# Altium PCB Power_meter.PCBDOC (part 2 of 2)
Units mm, origin at the board's own origin, x right, y up, seen from the top; angles counter-clockwise.
Board outline 21.4 x 72.8 mm, 2 copper layers (Top, Bot), stack 1.621 mm thick; 101 components, 79 nets, 320 pads, 151 vias.
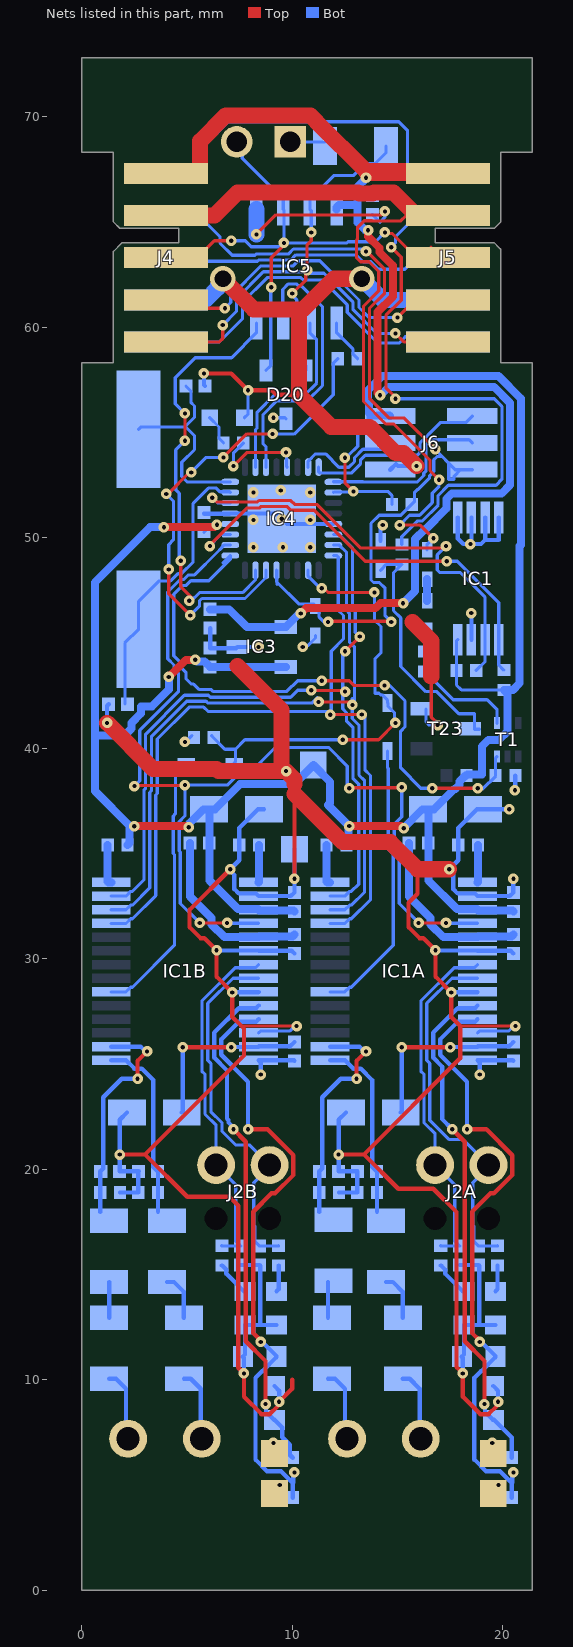
[diagram p2: the nets of this part, all layers, seen from the top]

## Via types
v1: diameter 0.5, hole 0.2, Top to Bot, tented both sides, 149 vias
v2: diameter 1.2, hole 0.8, Top to Bot, tented both sides, 2 vias

## Nets (pads, with @x,y where several pads share a name; then routed paths per layer and width w, separated by ;. In a path a pad name is that pad's centre, name@x,y a point inside that pad or via, vN(x,y) a via of type N, cw(c..) or ccw(c..) an arc to the next point about the centre after c; other vN are vias at no path point) (continued)
GND: C1A.1 C1B.1 C2A.2 C2B.2 C3.2 C3A.1 C3B.1 C4A.1 C4B.1 C5A.1 C5B.1 C6A.2 C6B.2 C7A.1 C7B.1 C8A.2 C8B.2 C9A.1 C9B.1 C10A.2 C10B.2 C11A.2 C11B.2 C12.1 C13.1 C14.1 C15.1 C16.1 D20.3 D21.2 D38.2 IC1.1 IC1.2 IC1.3 IC1.4 IC1.7 IC1A.2 IC1A.6 IC1A.9 IC1A.12 IC1A.14 IC1B.2 IC1B.6 IC1B.9 IC1B.12 IC1B.14 IC3.3 IC4.5 IC4.21 IC4.33 IC5.5 J4.9 J5.9 J6.6 LD1.1 R6A.1 R6B.1 R7A.1 R7B.1 R9A.1 R9B.1 R11A.2 R11B.2 R14A.2 R14B.2 R22.2 R146.1 T23.2 TP4.1 | length 243.1
  Top w0.152: 7.579,26.8 v1(10.2,26.8) ; v1(8.295,64.405) 9.222,65.332 14.233,65.332 v1(14.4,65.5) ; 16.6,43.4 16.6,41.477 16.9,41.177 v1(16.9,41.1) ; 17.979,26.8 v1(20.6,26.8)
  Top w0.203: v1(1.8,20.7) 3,20.7 ; v1(5.8,57.8) 7.1,57.8 v1(7.9,57) 9.04,57 9.254,56.786 10.314,56.786 ; v1(7.05,34.25) 5.121,32.321 5.121,31.502 5.644,30.979 5.821,30.979 v1(6.4,30.4) 6.4,29.15 v1(7.15,28.4) 7.15,27.229 7.579,26.8 7.7,26.679 7.7,25.4 3,20.7 ; 10,10 10,9.579 v1(9.373,8.952) 9.316,8.895 9.316,8.76 8.925,8.369 8.529,8.369 7.7,9.198 v1(7.7,10.3) 7.429,10.571 7.429,18.271 7.01,18.69 5.01,18.69 3,20.7 ; v1(10.1,33.8) 10.1,37.828 10.1,38.3 ; v1(12.2,20.7) 13.4,20.7 ; 15.95,34.25 15.95,33.09 15.521,32.662 15.521,31.502 16.044,30.979 16.221,30.979 v1(16.8,30.4) 16.8,29.15 v1(17.55,28.4) 17.55,27.229 17.979,26.8 17.979,25.279 13.4,20.7 ; v1(19.773,8.952) 19.716,8.895 19.716,8.76 19.325,8.369 18.929,8.369 18.1,9.198 v1(18.1,10.3) 17.8,10.6 17.8,17.968 16.697,19.071 15.029,19.071 13.4,20.7
  Top w0.762: v1(1.2,41.2) 3.392,39.008 6.392,39.008 6.487,38.913 9.487,38.913 9.487,41.813 7.4,43.9 ; v2(6.7,62.3) 8.158,60.842 10.314,60.842 ; v1(9.703,38.913) 10.1,38.516 10.1,38.3 ; 10.1,37.828 12.386,35.542 14.658,35.542 15.95,34.25 v1(17.45,34.25) ; v2(13.3,62.3) 11.972,62.3 10.514,60.842 10.314,60.842 ; 15.7,46 16.6,45.1 16.6,43.4 ; v1(15.9,53.4) 15.284,54.016 14.913,54.016 13.671,55.258 11.842,55.258 10.314,56.786 10.314,60.842
  Bot w0.152: v1(4.9,40.3) 4.93,40.3 R22.2@5.23,40.6 ; LD1.1@7.725,55.7 7.9,55.875 v1(7.9,57) ; IC1B.12@8.4,26.475 8.488,26.563 9.869,26.563 10.106,26.8 v1(10.2,26.8) ; v1(9.1,55.7) 9.65,55.7 D20.3@9.7,55.65 ; v1(10.5,44.809) 10.567,44.875 10.742,44.875 11.1,45.234 D21.2@11.1,45.359 ; C3.2@13.8,65.35 14.164,64.986 14.4,65.222 v1(14.4,65.5) ; T23.2@16.35,41.85 16.35,41.25 16.5,41.1 v1(16.9,41.1) ; IC1A.12@18.8,26.475 18.888,26.563 20.269,26.563 20.506,26.8 v1(20.6,26.8)
  Bot w0.203: v1(1.2,41.2) 1.2,42.011 C16.1@1.277,42.088 ; R6B.1@1.82,18.9 R7B.1@2.68,18.9 2.68,19.88 C5B.1@2.7,19.9 C4B.1@1.8,19.9 v1(1.8,20.7) 1.8,22.35 C2B.2@2.15,22.7 ; C14.1@5.8,51.15 5.819,51.131 7.031,51.131 IC4.5@7.05,51.15 9.25,51.15 v1(9.5,50.9) 9.75,50.65 IC4.21@11.95,50.65 ; v1(5.8,57.8) 5.8,57.25 C15.1@5.85,57.2 ; C13.1@6.1,44.75 C12.1@6.1,45.7 ; C13.1@6.1,44.75 7.33,44.75 IC3.3@7.389,44.809 v1(8.4,44.809) ; v1(6.4,30.4) 6.413,30.388 8.388,30.388 IC1B.6@8.4,30.375 9.975,30.375 C9B.1@10.1,30.25 ; v1(7.15,28.4) 7.163,28.413 8.388,28.413 IC1B.9@8.4,28.425 ; C7B.1@7.55,15.45 C8B.2@8.45,15.45 8.479,15.421 8.479,12.6 ; v1(7.7,10.3) 7.7,11.05 C6B.2@7.65,11.1 7.75,11.2 R9B.1@7.75,12.6 8.479,12.6 ; v1(8.5,24.5) 8.5,25.075 IC1B.14@8.4,25.175 10.075,25.175 C3B.1@10.1,25.15 ; C11B.2@8.65,37.1 8.375,37.1 7.48,36.205 R14B.2@7.48,35.4 7.48,34.68 v1(7.05,34.25) 7.05,34.17 7.246,33.973 7.246,33.305 7.453,33.098 8.277,33.098 IC1B.2@8.4,32.975 9.925,32.975 C10B.2@10.1,33.15 v1(10.1,33.8) TP4.1@10.1,35.2 ; C1B.1@9.15,9.7 9.373,9.477 v1(9.373,8.952) ; R11B.2@9.25,12.6 8.479,12.6 ; R6A.1@12.22,18.9 R7A.1@13.08,18.9 13.08,19.88 C5A.1@13.1,19.9 C4A.1@12.2,19.9 v1(12.2,20.7) 12.2,22.35 C2A.2@12.55,22.7 ; D38.2@14.192,49.85 14.192,50.539 14.253,50.6 v1(14.3,50.6) ; J6.6@14.65,53.23 14.92,53.5 15.02,53.4 v1(15.9,53.4) ; v1(16.8,30.4) 16.812,30.388 18.787,30.388 IC1A.6@18.8,30.375 20.375,30.375 C9A.1@20.5,30.25 ; v1(17.55,28.4) 17.562,28.413 18.787,28.413 IC1A.9@18.8,28.425 ; IC1.1@17.858,50.958 17.858,49.958 18.119,49.698 v1(18.459,49.698) ; C7A.1@17.95,15.45 C8A.2@18.85,15.45 18.879,15.421 18.879,12.6 ; v1(18.1,10.3) 18.1,11.05 C6A.2@18.05,11.1 18.15,11.2 R9A.1@18.15,12.6 18.879,12.6 ; v1(18.5,46.419) 18.508,46.411 IC1.7@18.508,45.158 ; IC1.2@18.508,50.958 18.508,49.747 v1(18.459,49.698) ; v1(18.9,24.5) 18.9,25.075 IC1A.14@18.8,25.175 20.475,25.175 C3A.1@20.5,25.15 ; IC1.3@19.158,50.958 19.158,49.889 ; C1A.1@19.55,9.7 19.773,9.477 v1(19.773,8.952) ; R11A.2@19.65,12.6 18.879,12.6 ; IC1.4@19.808,50.958 19.808,49.895 19.803,49.889 19.158,49.889 ; v1(20.3,37.1) C11A.2@19.05,37.1 18.775,37.1 17.88,36.205 R14A.2@17.88,35.4 17.88,34.68 v1(17.45,34.25) 17.45,34.17 17.646,33.973 17.646,33.305 17.853,33.098 18.677,33.098 IC1A.2@18.8,32.975 20.325,32.975 C10A.2@20.5,33.15 v1(20.5,33.8) ; v1(20.575,38) 20.595,38.02 R146.1@20.595,38.694 ; v1(18.459,49.698) 18.967,49.698 19.158,49.889
  Bot w0.762: J4.9@5.9,61.311 6.458,61.869 6.458,61.939 6.7,62.181 v2(6.7,62.3) ; v1(8.295,64.405) IC5.5@8.295,65.6 ; v2(13.3,62.3) 14.3,61.3 17.3,61.3 J5.9@17.4,61.4
  other v1: 8.153,49.547 9.553,49.547 10.853,49.547 8.153,50.847 10.853,50.847 8.153,52.147 10.853,52.147 9.453,52.247
I1N_INA: R3A.1 TP1A.1 | length 0.7
  Bot w0.203: R3A.1@19.48,6.3 19.49,6.31 19.49,6.99 v1(19.5,7)
I1N_INB: R3B.1 TP1B.1 | length 0.7
  Bot w0.203: R3B.1@9.08,6.3 9.09,6.31 9.09,6.99 v1(9.1,7)
I1NA: C1A.2 IC1A.10 R3A.2 | length 24.4
  Top w0.203: v1(17.6,21.9) 18.191,21.309 18.191,11.832 19.127,10.896 v1(19.127,8.848)
  Bot w0.203: v1(17.6,21.9) 17.117,22.383 17.117,24.875 16.691,25.301 16.691,26.49 17.853,27.652 18.677,27.652 IC1A.10@18.8,27.775 ; v1(19.127,8.848) 19.152,8.823 19.152,8.473 19.525,8.1 C1A.2@19.55,8.1 19.575,8.1 20.42,7.255 R3A.2@20.42,6.3
I1NB: C1B.2 IC1B.10 R3B.2 | length 24.4
  Top w0.203: v1(7.2,21.9) 7.791,21.309 7.791,11.832 8.727,10.896 v1(8.727,8.848)
  Bot w0.203: v1(7.2,21.9) 7.2,21.98 6.964,22.216 6.964,22.336 6.902,22.398 6.902,24.69 6.291,25.301 6.291,26.49 7.453,27.652 8.277,27.652 IC1B.10@8.4,27.775 ; v1(8.727,8.848) 8.752,8.823 8.752,8.473 9.125,8.1 C1B.2@9.15,8.1 9.521,7.729 9.521,7.273 9.879,6.915 9.879,6.441 R3B.2@10.02,6.3
I1P_INA: R10A.1 TP2A.1 | length 1.1
  Top w0.203: TP2A.1@19.55,4.835 19.757,5.043 v1(19.8,5)
  Bot w0.203: R10A.1@19.48,4.4 19.668,4.588 19.668,4.788 19.8,4.92 v1(19.8,5)
I1P_INB: R10B.1 TP2B.1 | length 1.1
  Top w0.203: TP2B.1@9.15,4.835 9.357,5.043 v1(9.4,5)
  Bot w0.203: R10B.1@9.08,4.4 9.268,4.588 9.268,4.788 9.4,4.92 v1(9.4,5)
I1PA: C6A.1 IC1A.11 R10A.2 | length 29.4
  Top w0.203: v1(18.3,21.9) 19.216,21.9 20.449,20.667 20.449,19.733 19.574,18.858 19.416,18.858 18.541,17.983 18.541,12.226 18.9,11.867 v1(18.9,11.8)
  Bot w0.203: v1(18.3,21.9) 18.3,24.159 17.021,25.438 17.021,26.17 17.853,27.002 18.677,27.002 IC1A.11@18.8,27.125 ; v1(18.9,11.8) 18.975,11.8 19.65,11.125 C6A.1@19.65,11.1 19.65,11.075 18.979,10.404 18.955,10.404 18.648,10.097 18.648,6.208 19.203,5.654 19.866,5.654 20.42,5.1 ; R10A.2@20.42,4.4 20.42,5.1 ; v1(20.5,5.6) 20.443,5.543 20.443,5.123 20.42,5.1
I1PB: C6B.1 IC1B.11 R10B.2 | length 29.4
  Top w0.203: v1(7.9,21.9) 8.816,21.9 10.049,20.667 10.049,19.733 9.174,18.858 9.016,18.858 8.141,17.983 8.141,12.226 8.5,11.867 v1(8.5,11.8)
  Bot w0.203: v1(7.9,21.9) 7.9,24.159 6.621,25.438 6.621,26.17 7.453,27.002 8.277,27.002 IC1B.11@8.4,27.125 ; v1(8.5,11.8) 8.575,11.8 9.25,11.125 C6B.1@9.25,11.1 9.25,11.075 8.579,10.404 8.555,10.404 8.248,10.097 8.248,6.208 8.803,5.654 9.466,5.654 10.02,5.1 ; R10B.2@10.02,4.4 10.02,5.1 ; v1(10.1,5.6) 10.043,5.543 10.043,5.123 10.02,5.1
I2N_INA: R11A.1 R12A.2 | length 1.3
  Bot w0.203: R11A.1@19.65,14.2 19.75,14.3 R12A.2@19.75,15.43
I2N_INB: R11B.1 R12B.2 | length 1.3
  Bot w0.203: R11B.1@9.25,14.2 9.35,14.3 R12B.2@9.35,15.43
I2NA: C8A.1 IC1A.8 J2A.2 R12A.1 | length 17.4
  Bot w0.152: IC1A.8@18.8,29.075 17.584,29.075 16.386,27.877 16.386,25.175 16.533,25.029 16.533,22.326 17.439,21.42 18.1,21.42 J2A.2@19.32,20.2 19.32,20.11 18.567,19.357 18.567,17.348 18.616,17.299 18.616,16.584 C8A.1@18.85,16.35 19.73,16.35 R12A.1@19.75,16.37
I2NB: C8B.1 IC1B.8 J2B.2 R12B.1 | length 17.4
  Bot w0.152: IC1B.8@8.4,29.075 7.184,29.075 5.986,27.877 5.986,25.175 6.133,25.029 6.133,22.736 6.659,22.21 6.659,21.8 7.302,21.157 7.963,21.157 J2B.2@8.92,20.2 8.92,20.11 8.167,19.357 8.167,17.348 8.216,17.299 8.216,16.584 C8B.1@8.45,16.35 9.33,16.35 R12B.1@9.35,16.37
I2P_INA: R8A.2 R9A.2 | length 1.7
  Bot w0.203: R8A.2@17.05,15.43 17.07,15.43 17.258,15.242 17.258,15.042 18.1,14.2 R9A.2@18.15,14.2
I2P_INB: R8B.2 R9B.2 | length 1.7
  Bot w0.203: R8B.2@6.65,15.43 6.67,15.43 6.858,15.242 6.858,15.042 7.7,14.2 R9B.2@7.75,14.2
I2PA: C7A.2 IC1A.7 J2A.1 R8A.1 | length 16.7
  Bot w0.152: R8A.1@17.05,16.37 17.07,16.35 C7A.2@17.95,16.35 17.716,16.584 17.716,19.264 J2A.1@16.78,20.2 16.78,21.684 16.253,22.211 16.253,24.51 16.107,24.656 16.107,27.993 17.69,29.576 18.651,29.576 IC1A.7@18.8,29.725
I2PB: C7B.2 IC1B.7 J2B.1 R8B.1 | length 16.7
  Bot w0.152: R8B.1@6.65,16.37 6.67,16.35 C7B.2@7.55,16.35 7.316,16.584 7.316,19.264 J2B.1@6.38,20.2 6.38,22.094 5.853,22.621 5.853,24.51 5.707,24.656 5.707,27.993 7.29,29.576 8.251,29.576 IC1B.7@8.4,29.725
IRQ: D8.1 D9.1 IC4.26 R22.1 | length 20.9
  Top w0.152: v1(11.4,47.6) 11.494,47.6 11.694,47.4 v1(13.9,47.4) ; v1(12.4,40.4) 14.1,40.4 v1(14.9,41.2)
  Bot w0.152: R22.1@6.17,40.6 6.17,40.58 6.8,39.95 7.3,39.95 ; D8.1@7.24,39.3 7.3,39.36 7.3,39.95 ; IC4.26@10.75,48.45 10.75,48.176 11.326,47.6 v1(11.4,47.6) ; v1(12.4,40.4) 7.75,40.4 7.3,39.95 ; v1(13.9,47.4) 13.9,46.095 14.212,45.783 14.212,44.528 13.929,44.245 13.929,42.611 14.115,42.611 14.195,42.53 14.282,42.53 14.518,42.294 D9.1@14.518,42.145 ; D9.1@14.546,42.145 14.546,41.994 14.854,41.686 14.854,41.246 v1(14.9,41.2)
LED: IC4.13 R23.1 | length 4.8
  Top w0.152: v1(7.2,53.4) 7.85,54.05 v1(9.7,54.05)
  Bot w0.152: v1(7.2,53.4) 7.2,54.01 7.67,54.48 R23.1@7.67,54.5 ; v1(9.7,54.05) 9.725,54.025 9.725,53.375 IC4.13@9.75,53.35
MODBUS_A: D20.1 IC5.6 J4.3 J5.3 JP1.2 | length 27.5
  Top w0.152: J4.3@4,63.3 5.5,63.3 6.3,64.1 v1(7.1,64.1) ; v1(9,61.9) 9,63.3 9.6,63.9 v1(9.6,64) ; v1(14.4,64.5) 14.45,64.45 14.75,64.45 15.9,63.3 J5.3@17.016,63.3 ; J5.3@16.592,63.794 16.592,63.724 J5.3@17.016,63.3 ; J5.3@17.4,63.3 J5.3@17.016,63.3
  Bot w0.152: v1(7.1,64.1) 7.774,64.1 8.053,63.821 9.521,63.821 9.6,63.9 v1(9.6,64) ; JP1.2@7.36,68.8 7.618,68.542 7.618,68.022 9.565,66.075 IC5.6@9.565,65.6 9.6,65.565 v1(9.6,64) ; D20.1@8.75,57.95 8.974,58.174 8.974,61.874 v1(9,61.9) ; v1(14.4,64.5) 13.953,64.053 12.643,64.053 12.59,64 v1(9.6,64)
MODBUS_B: D20.2 IC5.7 J4.5 J5.5 R6.1 | length 30.8
  Top w0.152: J4.5@4,59.3 6.541,59.3 6.7,59.459 v1(6.7,60.1) ; v1(10,61.6) 10.633,62.233 10.633,62.633 v1(10.7,62.7) 10.7,63.906 10.9,64.106 v1(10.9,64.5) ; v1(14.9,59.7) 15.3,59.3 J5.5@17.4,59.3
  Bot w0.152: v1(6.7,60.1) 7.35,60.75 7.35,61.355 8.628,62.632 10.633,62.632 v1(10.7,62.7) 10.843,62.557 11.505,62.557 12.888,61.175 12.888,60.817 14.005,59.7 v1(14.9,59.7) ; v1(10,61.6) 10,61.506 10.211,61.295 10.211,58.614 10.65,58.175 D20.2@10.65,57.95 ; v1(10.9,64.5) 10.9,65.535 IC5.7@10.835,65.6 10.835,66.075 11.96,67.2 12.9,67.2 13.476,67.776 13.951,67.776 14.45,68.275 R6.1@14.45,68.6
MODBUS_DE: IC4.11 IC5.3 | length 12.9
  Bot w0.152: IC4.11@8.75,53.35 8.75,54.321 8.608,54.463 8.608,55.849 9.259,56.5 10.707,56.5 11.433,57.225 11.433,60.965 10.43,61.967 10.274,61.967 10.188,62.053 9.812,62.053 9.547,61.788 9.547,61.018 9.565,61
MODBUS_DI: IC4.31 IC5.4 | length 20.6
  Top w0.152: v1(4.7,48.9) 4.7,47.677 5.203,47.174 5.1,47.07 v1(5.1,47) ; v1(4.9,54.6) v1(4.9,55.9)
  Bot w0.152: v1(4.7,48.9) 4.633,48.967 4.633,52.104 4.467,52.269 4.467,54.167 v1(4.9,54.6) ; v1(4.9,55.9) 4.437,56.363 4.437,57.594 5.39,58.548 7.118,58.548 8.295,59.725 IC5.4@8.295,60.2 ; v1(5.1,47) 5.197,47 5.203,46.994 5.203,47.006 5.59,47.393 7.638,47.393 8.25,48.005 IC4.31@8.25,48.45
MODBUS_R_En: IC4.10 IC5.2 | length 9
  Bot w0.152: IC4.10@8.25,53.35 8.25,55.138 8.328,55.216 8.328,55.964 9.143,56.779 10.592,56.779 11.153,57.341 11.153,59.407 10.835,59.725 IC5.2@10.835,60.2
MODBUS_RO: IC4.30 R7.1 | length 23
  Top w0.152: v1(4.014,52.081) 4.098,52.081 5.117,53.1 v1(5.2,53.1) ; v1(4.127,48.494) 4.127,47.332 v1(5.15,46.309) ; v1(6.726,53.813) 7.844,54.931 v1(9.061,54.931)
  Bot w0.152: v1(4.014,52.081) 4.353,51.742 4.353,49.898 4.127,49.671 v1(4.127,48.494) ; v1(5.15,46.309) 5.587,46.746 5.587,46.994 5.706,47.113 7.753,47.113 8.75,48.11 IC4.30@8.75,48.45 ; v1(5.2,53.1) 5.913,53.813 v1(6.726,53.813) ; v1(9.061,54.931) 9.07,54.922 10.084,54.922 11.949,56.786 11.949,58.286 R7.1@12.162,58.5
NetC9A_2: C9A.2 IC1A.5 L1A.2 | length 8.5
  Bot w0.381: L1A.2@15.54,35.5 15.54,32.963 16.567,31.935 16.567,31.63 17.172,31.025 IC1A.5@18.8,31.025 18.834,31.06 20.409,31.06 C9A.2@20.5,31.15
NetC9B_2: C9B.2 IC1B.5 L1B.2 | length 8.5
  Bot w0.381: L1B.2@5.14,35.5 5.14,32.963 6.168,31.935 6.168,31.63 6.772,31.025 IC1B.5@8.4,31.025 8.435,31.06 10.01,31.06 C9B.2@10.1,31.15
NetC15_2: C15.2 IC4.8 Q1.1 | length 9.7
  Bot w0.152: Q1.1@2.7,55.15 2.805,55.255 4.95,55.255 ; C15.2@4.95,57.2 5.184,56.966 5.184,56.424 5.353,56.255 5.353,55.712 4.95,55.309 4.95,55.255 ; IC4.8@7.05,52.65 7.047,52.647 5.012,52.647 4.747,52.912 4.747,53.579 5.353,54.185 5.353,54.851 4.95,55.255
NetC16_2: C16.2 IC4.7 Q1.2 | length 13.4
  Bot w0.152: C16.2@2.05,42.1 2.05,45 Q1.2@2.7,45.65 2.7,46.973 3.674,47.947 4.22,47.947 4.565,48.291 4.732,48.291 5.287,48.846 5.287,51.628 6.012,52.353 6.388,52.353 6.561,52.18 7.02,52.18 IC4.7@7.05,52.15
NetD8_2: D8.2 IC1B.20 | length 13
  Bot w0.152: IC1B.20@1.4,28.425 2.1,28.425 2.322,28.647 2.409,28.647 4.397,30.635 4.397,34.951 4.347,35 4.347,36.778 4.447,36.877 4.447,38.977 4.77,39.3 D8.2@4.96,39.3
NetD9_2: D9.2 IC1A.20 | length 13.3
  Bot w0.152: IC1A.20@11.8,28.425 12.5,28.425 12.722,28.647 12.809,28.647 14.797,30.635 14.797,34.951 14.558,35.189 14.558,39.041 14.518,39.082 D9.2@14.518,39.865
NetD38_1: D38.1 R9.2 T23.3 | length 11.7
  Bot w0.152: D38.1@14.192,48.45 14.472,48.73 R9.2@15.2,48.73 14.805,48.335 14.805,46.535 15.153,46.188 15.153,43.883 16.347,42.689 16.858,42.689 17.912,41.635 18.65,41.635 18.65,40.9 T23.3@18.883,40.9
NetD107_2: D107.2 D108.1 | length 1
  Bot w0.381: D108.1@16.4,47 D107.2@16.4,48.03
NetD108_2: D108.2 R145.2 | length 1.1
  Bot w0.152: R145.2@16.275,44.588 16.275,45.475 D108.2@16.4,45.6
NetIC1A_1: IC1A.1 R14A.1 | length 1.8
  Bot w0.381: IC1A.1@18.8,33.625 18.82,33.645 R14A.1@18.82,35.4
NetIC1A_28: IC1A.28 R13A.1 | length 1.9
  Bot w0.381: R13A.1@11.63,35.4 11.63,33.66 11.664,33.625 IC1A.28@11.8,33.625
NetIC1B_1: IC1B.1 R14B.1 | length 1.8
  Bot w0.381: IC1B.1@8.4,33.625 8.42,33.645 R14B.1@8.42,35.4
NetIC1B_28: IC1B.28 R13B.1 | length 1.9
  Bot w0.381: R13B.1@1.23,35.4 1.23,33.66 1.265,33.625 IC1B.28@1.4,33.625
NetIC5_1: IC5.1 R7.2 | length 2.1
  Bot w0.152: IC5.1@12.105,60.2 12.105,59.725 12.889,58.941 12.889,58.714 R7.2@13.102,58.5
NetJ1A_1: J1A.1 R2A.2 | length 3.4
  Bot w0.203: R2A.2@11.7,10.05 12.025,10.05 12.498,9.577 12.498,7.302 J1A.1@12.6,7.2
NetJ1A_2: J1A.2 R5A.2 | length 3.4
  Bot w0.203: R5A.2@15.25,10.05 15.575,10.05 16.048,9.577 16.048,7.252 J1A.2@16.1,7.2
NetJ1B_1: J1B.1 R2B.2 | length 3.4
  Bot w0.203: R2B.2@1.3,10.05 1.625,10.05 2.098,9.577 2.098,7.302 J1B.1@2.2,7.2
NetJ1B_2: J1B.2 R5B.2 | length 3.4
  Bot w0.203: R5B.2@4.85,10.05 5.175,10.05 5.648,9.577 5.648,7.252 J1B.2@5.7,7.2
NetJ5_7: J5.7 R9.1 | length 26.6
  Top w0.152: v1(14.7,63.8) 15.17,63.33 15.17,61.282 14.447,60.559 14.447,57.127 14.9,56.673 v1(14.9,56.6)
  Bot w0.152: v1(14.7,63.8) 14.903,64.003 14.903,64.303 15.9,65.3 J5.7@17.4,65.3 ; v1(14.9,56.6) 19.588,56.6 19.953,56.234 19.953,52.766 19.681,52.494 17.413,52.494 16.922,52.003 16.922,51.549 16.16,50.787 15.935,50.787 15.2,50.052 R9.1@15.2,49.67
NetJP1_1: JP1.1 R6.2 | length 1.8
  Bot w0.152: JP1.1@9.9,68.8 11.55,68.8 R6.2@11.65,68.9
NetLD1_2: LD1.2 R23.2 | length 1.5
  Bot w0.152: LD1.2@6.075,55.7 6.516,55.259 6.516,54.714 R23.2@6.73,54.5
NetR1A_2: R1A.2 R2A.1 | length 1.7
  Bot w0.203: R2A.1@11.7,12.95 R1A.2@11.7,14.65
NetR1B_2: R1B.2 R2B.1 | length 1.7
  Bot w0.203: R2B.1@1.3,12.95 R1B.2@1.3,14.65
NetR4A_2: R4A.2 R5A.1 | length 2.2
  Bot w0.203: R4A.2@14.45,14.65 14.775,14.65 15.248,14.177 15.248,12.952 R5A.1@15.25,12.95
NetR4B_2: R4B.2 R5B.1 | length 2.2
  Bot w0.203: R4B.2@4.05,14.65 4.375,14.65 4.848,14.177 R5B.1@4.85,12.95 R5B.1@4.85,12.95
NetR145_1: R145.1 T1.1 | length 4.8
  Bot w0.152: R145.1@16.275,43.648 16.295,43.648 17.643,42.3 19.25,42.3 19.725,41.825 T1.1@19.725,41.19
P3V3: C10A.1 C10B.1 C11A.1 C11B.1 C13.2 C14.2 IC1.8 IC1A.3 IC1B.3 IC3.2 IC4.4 IC4.18 J6.2 L1A.1 L1B.1 R8.2 R13A.2 R13B.2 R15.1 R16.1 R17.1 T1.2 TP3.1 | length 111.6
  Top w0.152: v1(12.5,53.8) 12.5,52.61 12.9,52.21 v1(12.9,52.2)
  Top w0.381: v1(2.489,36.297) 4.997,36.297 5.025,36.269 5.052,36.269 v1@5.08,36.297 ; v1(3.9,50.5) 6.303,50.5 v1(6.42,50.617) ; v1(4.134,43.384) 4.95,44.2 v1(5.39,44.2) ; v1(12.7,36.3) 15.154,36.3 15.236,36.218 15.259,36.218 v1@15.291,36.25
  Bot w0.152: C14.2@5.8,50.25 v1@6.187,50.637 ; IC4.18@11.95,52.15 11.975,52.175 12.875,52.175 v1(12.9,52.2) 14.539,52.2 14.73,52.009 R17.1@14.73,51.579 ; v1@12.688,53.926 13.107,54.345 13.107,55.047 13.599,55.539 J6.2@13.599,55.8 ; IC1.8@17.858,45.158 17.8,45.1 R16.1@17.8,43.7 17.8,43 18.03,42.77 R15.1@20.05,42.77
  Bot w0.381: R13B.2@2.17,35.4 2.27,35.5 2.27,36.27 v1@2.297,36.297 ; v1(2.489,36.297) v1@2.297,36.297 ; v1(3.9,50.5) 3.251,50.5 0.633,47.882 0.633,40.6 ; v1(4.134,43.384) 4.134,42.785 3.327,41.978 2.805,41.978 2.805,41.646 2.356,41.198 2.356,40.931 2.025,40.6 0.633,40.6 ; v1(5.08,36.246) 5.103,36.269 5.103,36.428 5.775,37.1 C11B.1@6.05,37.1 ; v1(5.39,44.2) 5.468,44.123 5.828,44.123 C13.2@6.1,43.85 9.68,43.85 IC3.2@9.689,43.859 ; C10B.1@10.1,32.25 10.06,32.291 8.435,32.291 IC1B.3@8.4,32.325 8.366,32.36 7.417,32.36 6.06,33.716 L1B.1@6.06,35.5 6.06,37.09 C11B.1@6.05,37.1 ; R13A.2@12.57,35.4 12.669,35.5 12.669,36.237 12.7,36.268 v1(12.7,36.3) 11.7,37.3 11.8,37.4 11.8,38.4 TP3.1@11,39.2 10.1,38.3 7.525,38.3 6.325,37.1 C11B.1@6.05,37.1 ; J6.2@14.65,55.77 14.62,55.8 13.765,55.8 13.641,55.924 13.641,56.489 13.599,56.531 13.599,57.001 14.273,57.675 19.787,57.675 20.855,56.608 20.855,49.661 ; v1(15.291,36.195) 15.291,36.216 16.175,37.1 C11A.1@16.45,37.1 ; C10A.1@20.5,32.25 20.459,32.291 18.834,32.291 IC1A.3@18.8,32.325 18.765,32.36 17.816,32.36 16.46,33.716 L1A.1@16.46,35.5 16.46,37.09 C11A.1@16.45,37.1 ; 20.8,49.607 20.8,43.09 20.48,42.77 R15.1@20.05,42.77 20.225,42.595 T1.2@20.225,41.19 20.225,40.8 19.825,40.4 19.325,40.4 19,40.075 19,38.756 18.326,38.756 R8.2@18.27,38.7 18.222,38.7 17.938,38.416 17.938,38.258 17.752,38.072 17.697,38.072 16.725,37.1 C11A.1@16.45,37.1 ; 0.633,40.6 0.633,37.961 v1@2.297,36.297
P5V0: C3.1 C12.2 IC3.1 IC5.8 J4.1 J5.1 | length 63.4
  Top w0.381: v1(10.4,46.4) 10.659,46.659 13.962,46.659 14.192,46.889 v1(15.259,46.889) ; v1(13.5,67.1) 13.523,67.123 17.023,67.123 J5.1@17.3,67.4 ; v1(13.6,64.6) 13.6,64.302 14.132,63.77 14.132,63.565 14.776,62.921 14.776,61.445 14.053,60.722 14.053,56.879 v1(14.166,56.766)
  Top w0.762: J4.1@4,67.3 5.5,67.3 5.619,67.419 5.619,68.838 6.839,70.058 10.86,70.058 11.158,69.76 11.158,69.742 13.481,67.419 15.781,67.419 15.8,67.4 J5.1@17.3,67.4
  Bot w0.381: C12.2@6.1,46.6 7,46.6 7.841,45.759 IC3.1@9.689,45.759 10.33,46.4 v1(10.4,46.4) ; IC5.8@12.105,65.6 12.105,65.69 12.214,65.8 13.1,65.8 ; v1(13.5,67.1) 13.5,67.068 13.1,66.668 13.1,66.25 ; v1(13.6,64.6) 13.481,64.6 13.1,64.981 13.1,65.8 ; C3.1@13.8,66.25 13.1,66.25 ; v1(14.166,56.766) 14.198,56.766 14.6,57.167 19.577,57.167 20.347,56.397 20.347,52.5 19.947,52.1 17.576,52.1 17.316,51.84 17.316,51.386 16.323,50.393 16.289,50.393 15.827,49.932 15.827,47.458 v1(15.259,46.889) ; 13.1,65.8 13.1,66.25
P12V0: D107.1 J4.2 J5.2 | length 39.3
  Top w0.152: v1(15.1,50.6) 16.07,50.6 v1(16.701,49.969) ; v1(16.973,52.756) 16.541,53.188 16.541,53.68 14.821,55.4 14.447,55.4 13.38,56.467 13.38,61.001 14.103,61.724 14.103,62.642 13.642,63.103 13.238,63.103 13.047,63.294 13.047,64.142 13.1,64.196 13.1,64.741 13.412,65.053 13.788,65.053 13.794,65.047 15.147,65.047 15.4,65.3 J5.2@17.4,65.3
  Top w0.762: J4.2@4,65.3 6.3,65.3 7.4,66.4 13.128,66.4 13.186,66.342 13.814,66.342 13.872,66.4 14.8,66.4 15.8,65.4 J5.2@17.4,65.4
  Bot w0.152: v1(15.1,50.6) 15.566,51.066 16.044,51.066 16.643,51.665 16.643,52.119 16.973,52.449 v1(16.973,52.756) v1@17,52.783 ; D107.1@16.4,49.43 16.4,49.69 16.679,49.969 v1(16.701,49.969)
PGood: IC4.1 R146.2 T1.6 | length 29
  Top w0.152: v1(11.4,43.2) 12.7,43.2 12.916,42.984 v1(14.383,42.984) ; v1(16.65,38.102) 18.601,38.102 18.703,38 v1(18.805,38.102)
  Bot w0.152: 6.71,48.81 IC4.1@7.05,49.15 7.05,48.972 6.03,47.951 5.183,47.951 4.964,47.733 4.797,47.733 4.367,47.303 4.367,44.396 4.658,44.106 4.658,43.897 4.947,43.607 4.947,43.312 5.212,43.047 5.31,43.047 5.565,42.791 6.135,42.791 6.226,42.7 9.741,42.7 10.249,43.208 11.392,43.208 v1(11.4,43.2) ; v1(14.383,42.984) 14.616,42.984 15.353,42.247 15.353,41.012 15.143,40.802 15.143,39.063 16.103,38.102 v1(16.65,38.102) ; v1(18.805,38.102) 19.024,38.102 19.054,38.072 19.655,38.674 R146.2@19.655,38.694 19.655,39.54 T1.6@19.725,39.61
PM_RESETn: IC1A.4 IC1B.4 IC4.2 | length 48.8
  Top w0.152: v1(2.5,38.2) 2.525,38.225 4.875,38.225 v1(4.9,38.25) ; v1(5.6,31.7) v1(6.9,31.7) ; v1(12.7,38.1) 12.725,38.125 15.175,38.125 v1(15.2,38.15) ; v1(16,31.7) v1(17.3,31.7)
  Bot w0.152: v1(2.5,38.2) 2.75,38.45 2.75,40.844 4.587,42.682 4.587,43.572 4.378,43.781 4.378,43.953 4.088,44.244 4.088,47.419 4.681,48.012 4.848,48.012 5.067,48.231 5.356,48.231 6.422,49.296 6.629,49.503 6.653,49.503 6.653,49.555 6.748,49.65 IC4.2@7.05,49.65 ; v1(5.6,31.7) 4.676,32.624 4.676,35.066 4.627,35.116 4.627,36.509 4.9,36.782 v1(4.9,38.25) 6.918,38.25 7.362,38.694 7.857,38.694 9.202,40.038 11.719,40.038 12.608,39.15 12.608,38.192 v1(12.7,38.1) ; v1(6.9,31.7) 6.913,31.688 8.388,31.688 IC1B.4@8.4,31.675 ; v1(15.2,38.15) 15.2,36.745 14.838,36.383 14.838,35.305 15.076,35.066 15.076,32.624 v1(16,31.7) ; v1(17.3,31.7) 17.312,31.688 18.787,31.688 IC1A.4@18.8,31.675
PROG_MISO: IC4.16 J6.1 | length 9
  Bot w0.152: IC4.16@11.25,53.35 11.25,53.135 11.318,53.067 12.803,53.067 13.233,53.496 13.233,53.68 13.469,53.917 15.934,53.917 16.067,54.05 16.067,54.503 17.03,55.466 18.246,55.466 J6.1@18.55,55.77
PROG_MOSI: IC4.15 J6.4 | length 5.2
  Bot w0.152: IC4.15@10.75,53.35 10.75,53.625 11.103,53.978 11.58,53.978 12.211,53.347 12.688,53.347 12.953,53.612 12.953,53.796 13.354,54.196 14.346,54.196 J6.4@14.65,54.5
PROG_SCK: IC4.17 J6.3 | length 8.3
  Bot w0.152: IC4.17@11.95,52.65 11.953,52.653 13.359,52.653 13.366,52.647 15.934,52.647 16.24,52.953 16.24,53.06 16.353,53.172 16.353,53.844 16.347,53.851 16.347,54.388 16.612,54.653 18.397,54.653 J6.3@18.55,54.5
RESETn: D21.1 IC4.29 J4.7 J6.5 R17.2 | length 44.5
  Top w0.152: v1(11.7,46) 11.733,46.033 14.667,46.033 v1(14.7,46) ; v1(13.5,63.6) 13.541,63.6 14.383,62.758 14.383,61.608 13.659,60.885 13.659,56.632 14.612,55.679 15.321,55.679 v1(16.8,54.2)
  Bot w0.152: J4.7@4,65.3 5.5,65.3 5.924,64.876 5.982,64.876 6.565,64.294 6.565,63.994 7.147,63.412 8.222,63.412 8.28,63.471 9.812,63.471 10.053,63.712 13.388,63.712 v1(13.5,63.6) ; 9.275,47.775 9.275,48.425 IC4.29@9.25,48.45 9.25,47.904 10.301,46.853 11.006,46.853 D21.1@11.1,46.759 11.274,46.585 11.274,46.226 v1@11.5,46 ; v1(14.7,46) 14.407,46.292 14.407,47.6 14.136,47.872 13.858,47.872 13.739,47.991 13.739,50.679 14.125,51.066 15.157,51.066 R17.2@15.67,51.579 15.8,51.709 15.8,52.135 15.965,52.3 15.982,52.3 16.52,52.837 16.52,52.944 16.721,53.145 16.721,53.694 16.884,53.858 17.116,53.858 ; v1(16.8,54.2) 16.8,54.174 17.426,53.548 17.426,52.774 17.684,52.774 17.684,52.926 J6.5@17.988,53.23 ; 17.279,53.694 17.279,53.681 17.73,53.23 J6.5@17.988,53.23 ; J6.5@18.55,53.23 J6.5@17.988,53.23
RSV0: J4.4 J5.4 | length 16.4
  Top w0.152: J4.4@4,61.3 5.5,61.3 5.9,60.9 v1(6.8,60.9) ; v1(14.992,60.453) 15.838,61.3 J5.4@17.4,61.3
  Bot w0.152: v1(6.8,60.9) 7.071,61.171 7.071,61.471 8.512,62.912 10.043,62.912 10.284,63.153 11.305,63.153 13.167,61.291 13.167,60.933 13.647,60.453 v1(14.992,60.453)
RSV1: J4.6 J5.6 | length 17
  Bot w0.152: J4.6@4,67.3 5.5,67.3 5.924,67.724 5.924,68.712 6.965,69.753 15.059,69.753 15.476,69.336 15.476,67.724 15.9,67.3 J5.6@17.4,67.3
RSV2: J4.8 J5.8 | length 14.1
  Bot w0.152: J4.8@4,63.3 4.168,63.132 8.337,63.132 8.396,63.191 9.927,63.191 10.169,63.432 13.026,63.432 13.356,63.103 13.733,63.103 14.089,62.747 15.347,62.747 15.9,63.3 J5.8@17.4,63.3
RSV3: J4.10 J5.10 | length 16.9
  Bot w0.152: J4.10@4,59.3 6.541,59.3 7.63,60.389 7.63,61.171 8.812,62.353 10.406,62.353 10.512,62.247 11.421,62.247 12.608,61.059 12.608,60.702 14.063,59.247 15.088,59.247 15.353,59.512 15.353,59.547 17.153,59.547 J5.10@17.4,59.3
SCL1: IC1.6 IC4.6 R16.2 | length 20.9
  Top w0.152: v1(6.2,51.9) 6.203,51.9 6.41,51.694 8.341,51.694 8.411,51.764 9.932,51.764 10.116,51.579 11.157,51.579 13.22,49.516 17.216,49.516 v1(17.3,49.6)
  Bot w0.152: v1(6.2,51.9) 6.45,51.65 IC4.6@7.05,51.65 ; v1(17.3,49.6) 16.88,49.18 16.88,48.467 17,48.347 17.974,48.347 19.158,47.162 IC1.6@19.158,45.158 19.158,44.118 R16.2@18.74,43.7
SCLK: IC1A.25 IC1B.25 IC4.24 | length 40.1
  Top w0.152: v1(11.8,41.588) 11.812,41.6 v1(13.3,41.6)
  Bot w0.152: IC1B.25@1.4,31.675 2.1,31.675 2.322,31.897 2.409,31.897 3.509,32.997 3.509,37.778 3.588,37.857 3.588,40.436 5.105,41.953 5.788,41.953 5.994,41.747 11.641,41.747 v1(11.8,41.588) 11.853,41.641 11.853,44.612 12.433,45.192 12.433,46.303 12.182,46.554 12.182,49.082 12.114,49.15 IC4.24@11.95,49.15 ; IC1A.25@11.8,31.675 12.5,31.675 12.722,31.897 12.809,31.897 13.712,32.8 13.712,38.702 13.446,38.968 13.446,41.454 v1(13.3,41.6)
SDA1: IC1.5 IC4.3 R15.2 | length 21
  Top w0.152: v1(6.086,49.601) 6.086,49.642 7.858,51.414 8.457,51.414 8.527,51.484 9.742,51.484 9.926,51.3 11.041,51.3 13.458,48.883 v1(17.333,48.883)
  Bot w0.152: v1@6.02,49.563 v1@6.058,49.601 ; v1(6.086,49.601) v1@6.058,49.601 ; IC4.3@7.05,50.15 6.607,50.15 v1@6.058,49.601 ; v1(17.333,48.883) 17.832,48.883 19.808,46.908 IC1.5@19.808,45.158 19.808,43.952 R15.2@20.05,43.71
SI/RX: IC1A.27 IC1B.27 IC4.22 | length 38.9
  Top w0.152: v1(10.9,42.755) 10.908,42.747 12.449,42.747 v1(12.507,42.689) ; v1@12.393,44.607 v1(12.507,44.607) v1(13.2,45.3)
  Bot w0.152: IC1B.27@1.4,32.975 2.1,32.975 2.322,33.197 2.409,33.197 2.95,33.738 2.95,38.009 3.029,38.088 3.029,40.667 4.874,42.512 6.019,42.512 6.11,42.421 9.921,42.421 10.255,42.755 v1(10.9,42.755) ; IC1A.27@11.8,32.975 12.5,32.975 12.722,33.197 12.809,33.197 13.153,33.541 13.153,38.288 12.887,38.554 12.887,40.977 12.567,41.296 12.567,41.698 12.4,41.866 12.4,44.5 v1(12.507,44.607) ; IC4.22@11.95,50.15 12.225,50.15 12.858,49.517 12.858,46.669 12.991,46.535 12.991,45.509 v1(13.2,45.3)
SO/TX: IC1A.26 IC1B.26 IC4.23 | length 39.8
  Top w0.152: v1(11.25,42.2) 12.706,42.2 v1(12.853,42.053)
  Bot w0.152: IC1B.26@1.4,32.325 2.1,32.325 2.322,32.547 2.409,32.547 3.23,33.367 3.23,37.894 3.309,37.973 3.309,40.551 4.99,42.233 5.903,42.233 5.995,42.141 10.927,42.141 11.186,42.4 v1@11.2,42.4 ; IC1A.26@11.8,32.325 12.5,32.325 12.722,32.547 12.809,32.547 13.433,33.17 13.433,38.458 13.167,38.724 13.167,41.092 12.847,41.412 12.847,42.353 12.853,42.347 v1(12.853,42.053) 12.96,42.16 12.96,44.795 12.712,45.043 12.712,46.419 12.578,46.553 12.578,49.297 12.225,49.65 IC4.23@11.95,49.65
VNA: C5A.2 IC1A.15 R4A.1 R7A.2 | length 8.7
  Bot w0.203: IC1A.15@11.8,25.175 12.5,25.175 12.896,24.779 13.248,24.779 13.792,24.235 13.792,20.108 C5A.2@14,19.9 14.02,19.9 R7A.2@14.02,18.9 R4A.1@14.02,17.98
VNB: C5B.2 IC1B.15 R4B.1 R7B.2 | length 8.7
  Bot w0.203: IC1B.15@1.4,25.175 2.1,25.175 2.496,24.779 2.848,24.779 3.392,24.235 3.392,20.108 C5B.2@3.6,19.9 3.62,19.9 R7B.2@3.62,18.9 R4B.1@3.62,17.98
VPA: C4A.2 IC1A.16 R1A.1 R6A.2 | length 10.8
  Top w0.203: v1(13.05,24.3) 13.05,25.15 v1(13.5,25.6)
  Bot w0.203: R1A.1@11.28,17.97 R6A.2@11.28,18.9 11.28,19.9 11.421,20.041 11.421,23.42 12.302,24.3 v1(13.05,24.3) ; IC1A.16@11.8,25.825 13.195,25.825 13.42,25.6 v1(13.5,25.6)
VPB: C4B.2 IC1B.16 R1B.1 R6B.2 | length 10.8
  Top w0.203: v1(2.65,24.3) 2.65,25.15 v1(3.1,25.6)
  Bot w0.203: R1B.1@0.88,17.97 R6B.2@0.88,18.9 0.88,19.9 1.021,20.041 1.021,23.42 1.902,24.3 v1(2.65,24.3) ; IC1B.16@1.4,25.825 2.795,25.825 3.02,25.6 v1(3.1,25.6)
VREFA: C2A.1 C3A.2 IC1A.13 | length 8.5
  Top w0.203: v1(15.2,25.8) v1(17.5,25.8)
  Bot w0.203: C2A.1@15.15,22.7 15.2,22.75 v1(15.2,25.8) ; v1(17.5,25.8) 17.512,25.813 18.787,25.813 IC1A.13@18.8,25.825 18.817,25.842 20.292,25.842 C3A.2@20.5,26.05
VREFB: C2B.1 C3B.2 IC1B.13 | length 8.5
  Top w0.203: v1(4.8,25.8) v1(7.1,25.8)
  Bot w0.203: C2B.1@4.75,22.7 4.8,22.75 v1(4.8,25.8) ; v1(7.1,25.8) 7.113,25.813 8.388,25.813 IC1B.13@8.4,25.825 8.417,25.842 9.892,25.842 C3B.2@10.1,26.05
pads on no net: IC1A.17 IC1A.18 IC1A.19 IC1A.21 IC1A.23 IC1B.17 IC1B.18 IC1B.19 IC1B.21 IC1B.23 IC4.9 IC4.14 IC4.20 IC4.27 IC4.28 J2A.3 J2A.4 J2B.3 J2B.4 T1.3 T1.4 T1.5

## Polygon pours and split planes (outlines as drawn)
GND on Top "Signal Layer 1-No Net 1" (solid, remove dead copper, pour order 0): 0,70 21.4,70 21.4,9.2 0,9.2

## Keep-outs
Top:
  lines w0.1: 0,0.9 21.3,0.9 ; 0,71.9 21.4,71.9 ; 1.912,58.3 6.008,58.3 6.254,58.546 ; 15,58.3 15.158,58.142 19.519,58.142
Bot:
  lines w0.1: 0,2.65 21.4,2.65 ; 0,70.15 21.4,70.15
  lines w0.8: 10.25,7.6 10.4,7.75 10.4,15.95 10.55,16.1
  lines w1: 0.1,11.6 5.8,11.6 ; 3.05,13.2 3.15,13.1 3.15,9.1 3.95,8.3 3.95,3.9 ; 5.6,16.15 5.6,14.65 6.45,13.8 6.45,10.3 7.4,9.35 7.4,4.45 7.85,4 ; 10.55,16.1 15.45,16.1 16.221,15.329 16.221,14.629 16.85,14 16.85,9.4 17.75,8.5 17.75,3.6 ; 11.25,3.7 11.3,6 ; 13.65,13.3 13.65,8.7 14.55,7.8 14.55,3.4
KeepOutLayer:
  lines w0.1: 5.9,62.1 5.9,62.6 ; 5.9,64.1 5.9,64.6
  lines w0.254: 0,0.35 0,0 ; 0,0 0,0.15 ; 0,0 21.4,0 21.4,58.3 19.9,58.3 19.9,63.7 19.8,63.8 19.625,64.102 16.825,64.102 16.8,64.7 19.6,64.7 19.9,65 19.9,68.3 21.4,68.3 21.4,72.8 0,72.8 0,68.3 1.5,68.3 1.5,64.6 4.6,64.6 4.6,64 1.5,64 1.5,58.3 0,58.3 0,43.8 0,0.15 ; 0,0.15 0,0.15

## Silkscreen, mask and mechanical layers (free items; w line width, h text height)
TopOverlay:
  text "Energy" at 6.425,53.25 h1.5
  text "Meter" at 7.825,49.55 h1.5
  text "v1.0" at 9.525,46.55 h1.52
  text "I probe1" at 12.268,24.333 h1.2
  text "I probe0" at 1.25,24.3 h1.2
  text "AC1" at 2.85,13.8 h1.5
  text "AC2" at 12.45,13.7 h1.5
  text "L" at 1.65,11.8 h1.2
  text "N" at 5.45,11.8 h1.2
  text "L" at 12.35,11.6 h1.2
  text "N" at 16.15,11.6 h1.2
Mechanical1:
  lines w0.254: 0,0.35 0,0 ; 0,0 21.4,0 21.4,58.3 19.9,58.3 19.9,63.7 19.8,63.8 19.6,64 16.8,64 16.8,64.6 19.5,64.6 19.9,65 19.9,68.3 21.4,68.3 21.4,72.8 0,72.8 0,68.3 1.5,68.3 1.5,64.6 4.6,64.6 4.6,64 1.5,64 1.5,58.3 0,58.3 0,43.8 0,0.15 ; 0,0 0,0.15 ; 0,0.15 0,0.15

## Text inside footprints (layer, text, board x,y; h text height)
J1A: TopOverlay "2" at 15.8,9.575 h1; TopOverlay "1" at 12.4,9.575 h1
J1B: TopOverlay "2" at 5.4,9.575 h1; TopOverlay "1" at 2,9.575 h1
J2A: TopOverlay "2" at 18.939,21.978 h1; TopOverlay "1" at 16.653,21.978 h1
J2B: TopOverlay "2" at 8.539,21.978 h1; TopOverlay "1" at 6.253,21.978 h1
J4: TopOverlay "1" at 7.125,66.5 h1.2; TopOverlay "5" at 6.825,58.52 h1.2; BottomOverlay "6" at 7.25,67.7 h1.2 r180; BottomOverlay "10" at 6.95,59.72 h1.2 r180
J5: TopOverlay "5" at 13.875,58.7 h1.2; TopOverlay "1" at 14.175,66.68 h1.2; BottomOverlay "10" at 13,59.9 h1.2 r180; BottomOverlay "6" at 14.05,67.88 h1.2 r180